# Altium PCB diban1.PcbDoc (part 1 of 2)
Units mil, origin at the board's own origin, x right, y up, seen from the top; angles counter-clockwise.
Board outline 3145.03 x 2732.03 mil, 2 copper layers (Top Layer, Bottom Layer); 163 components, 145 nets, 662 pads, 182 vias.
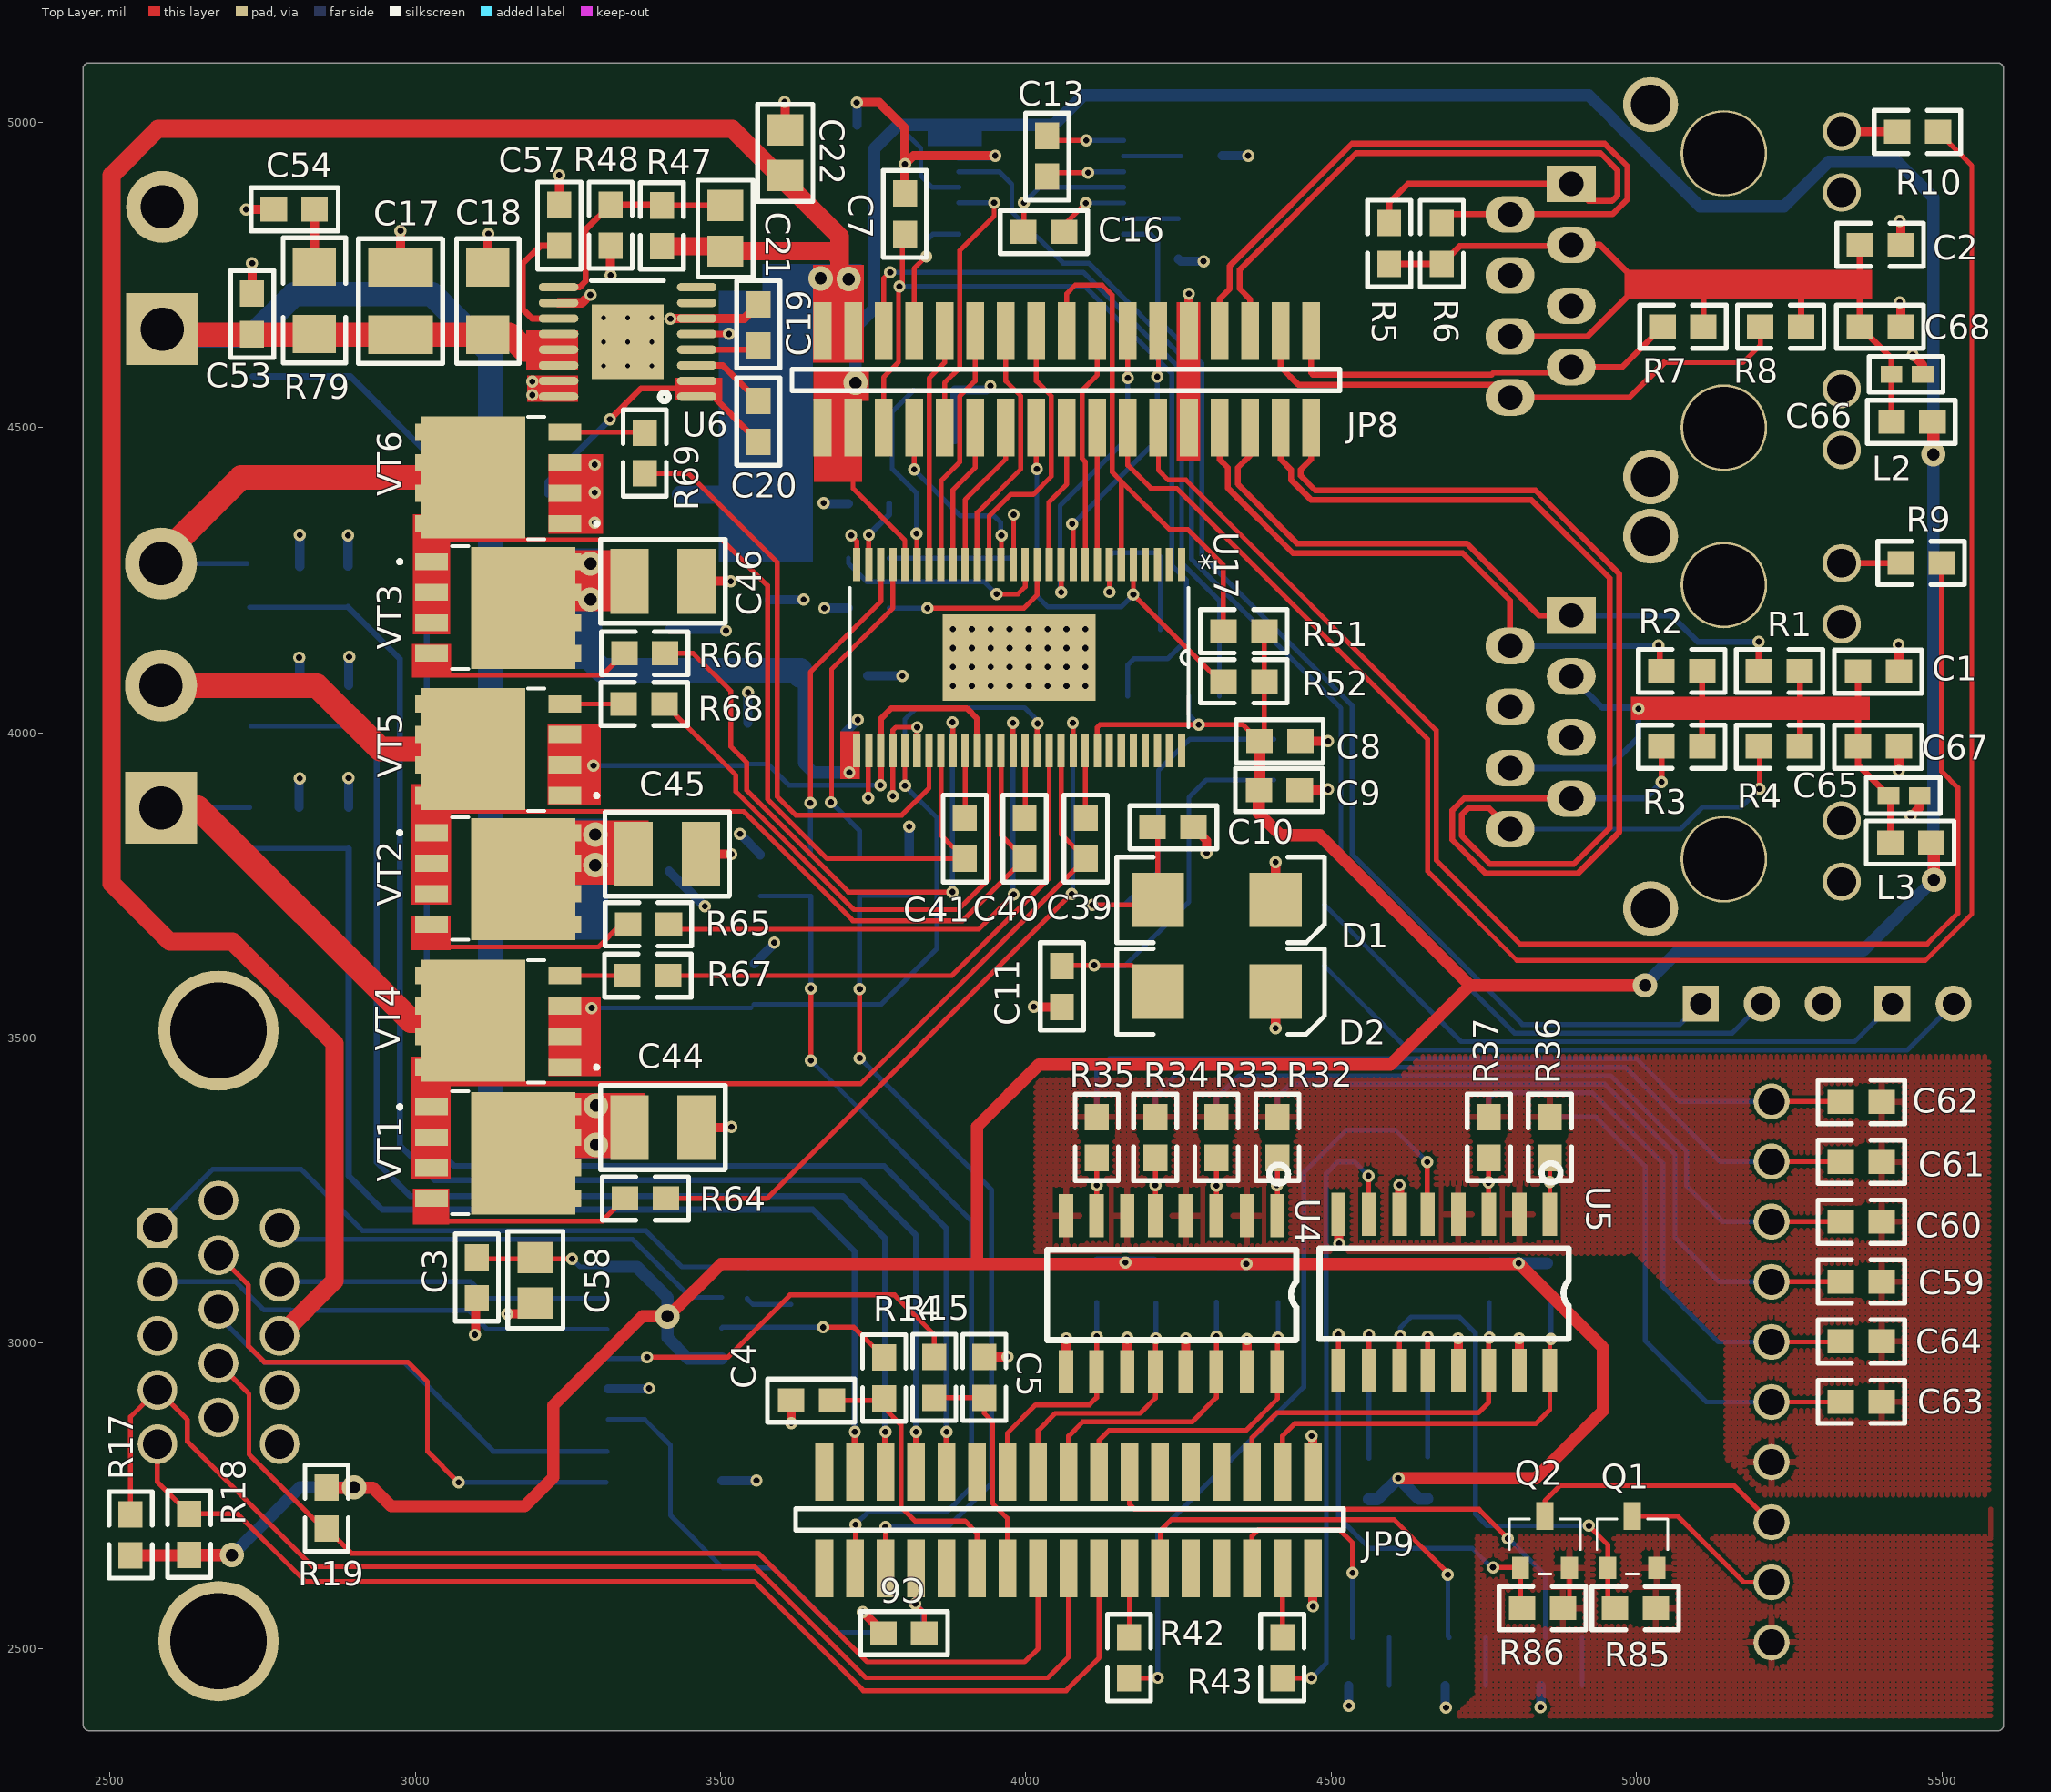
[diagram p0: Top Layer view]
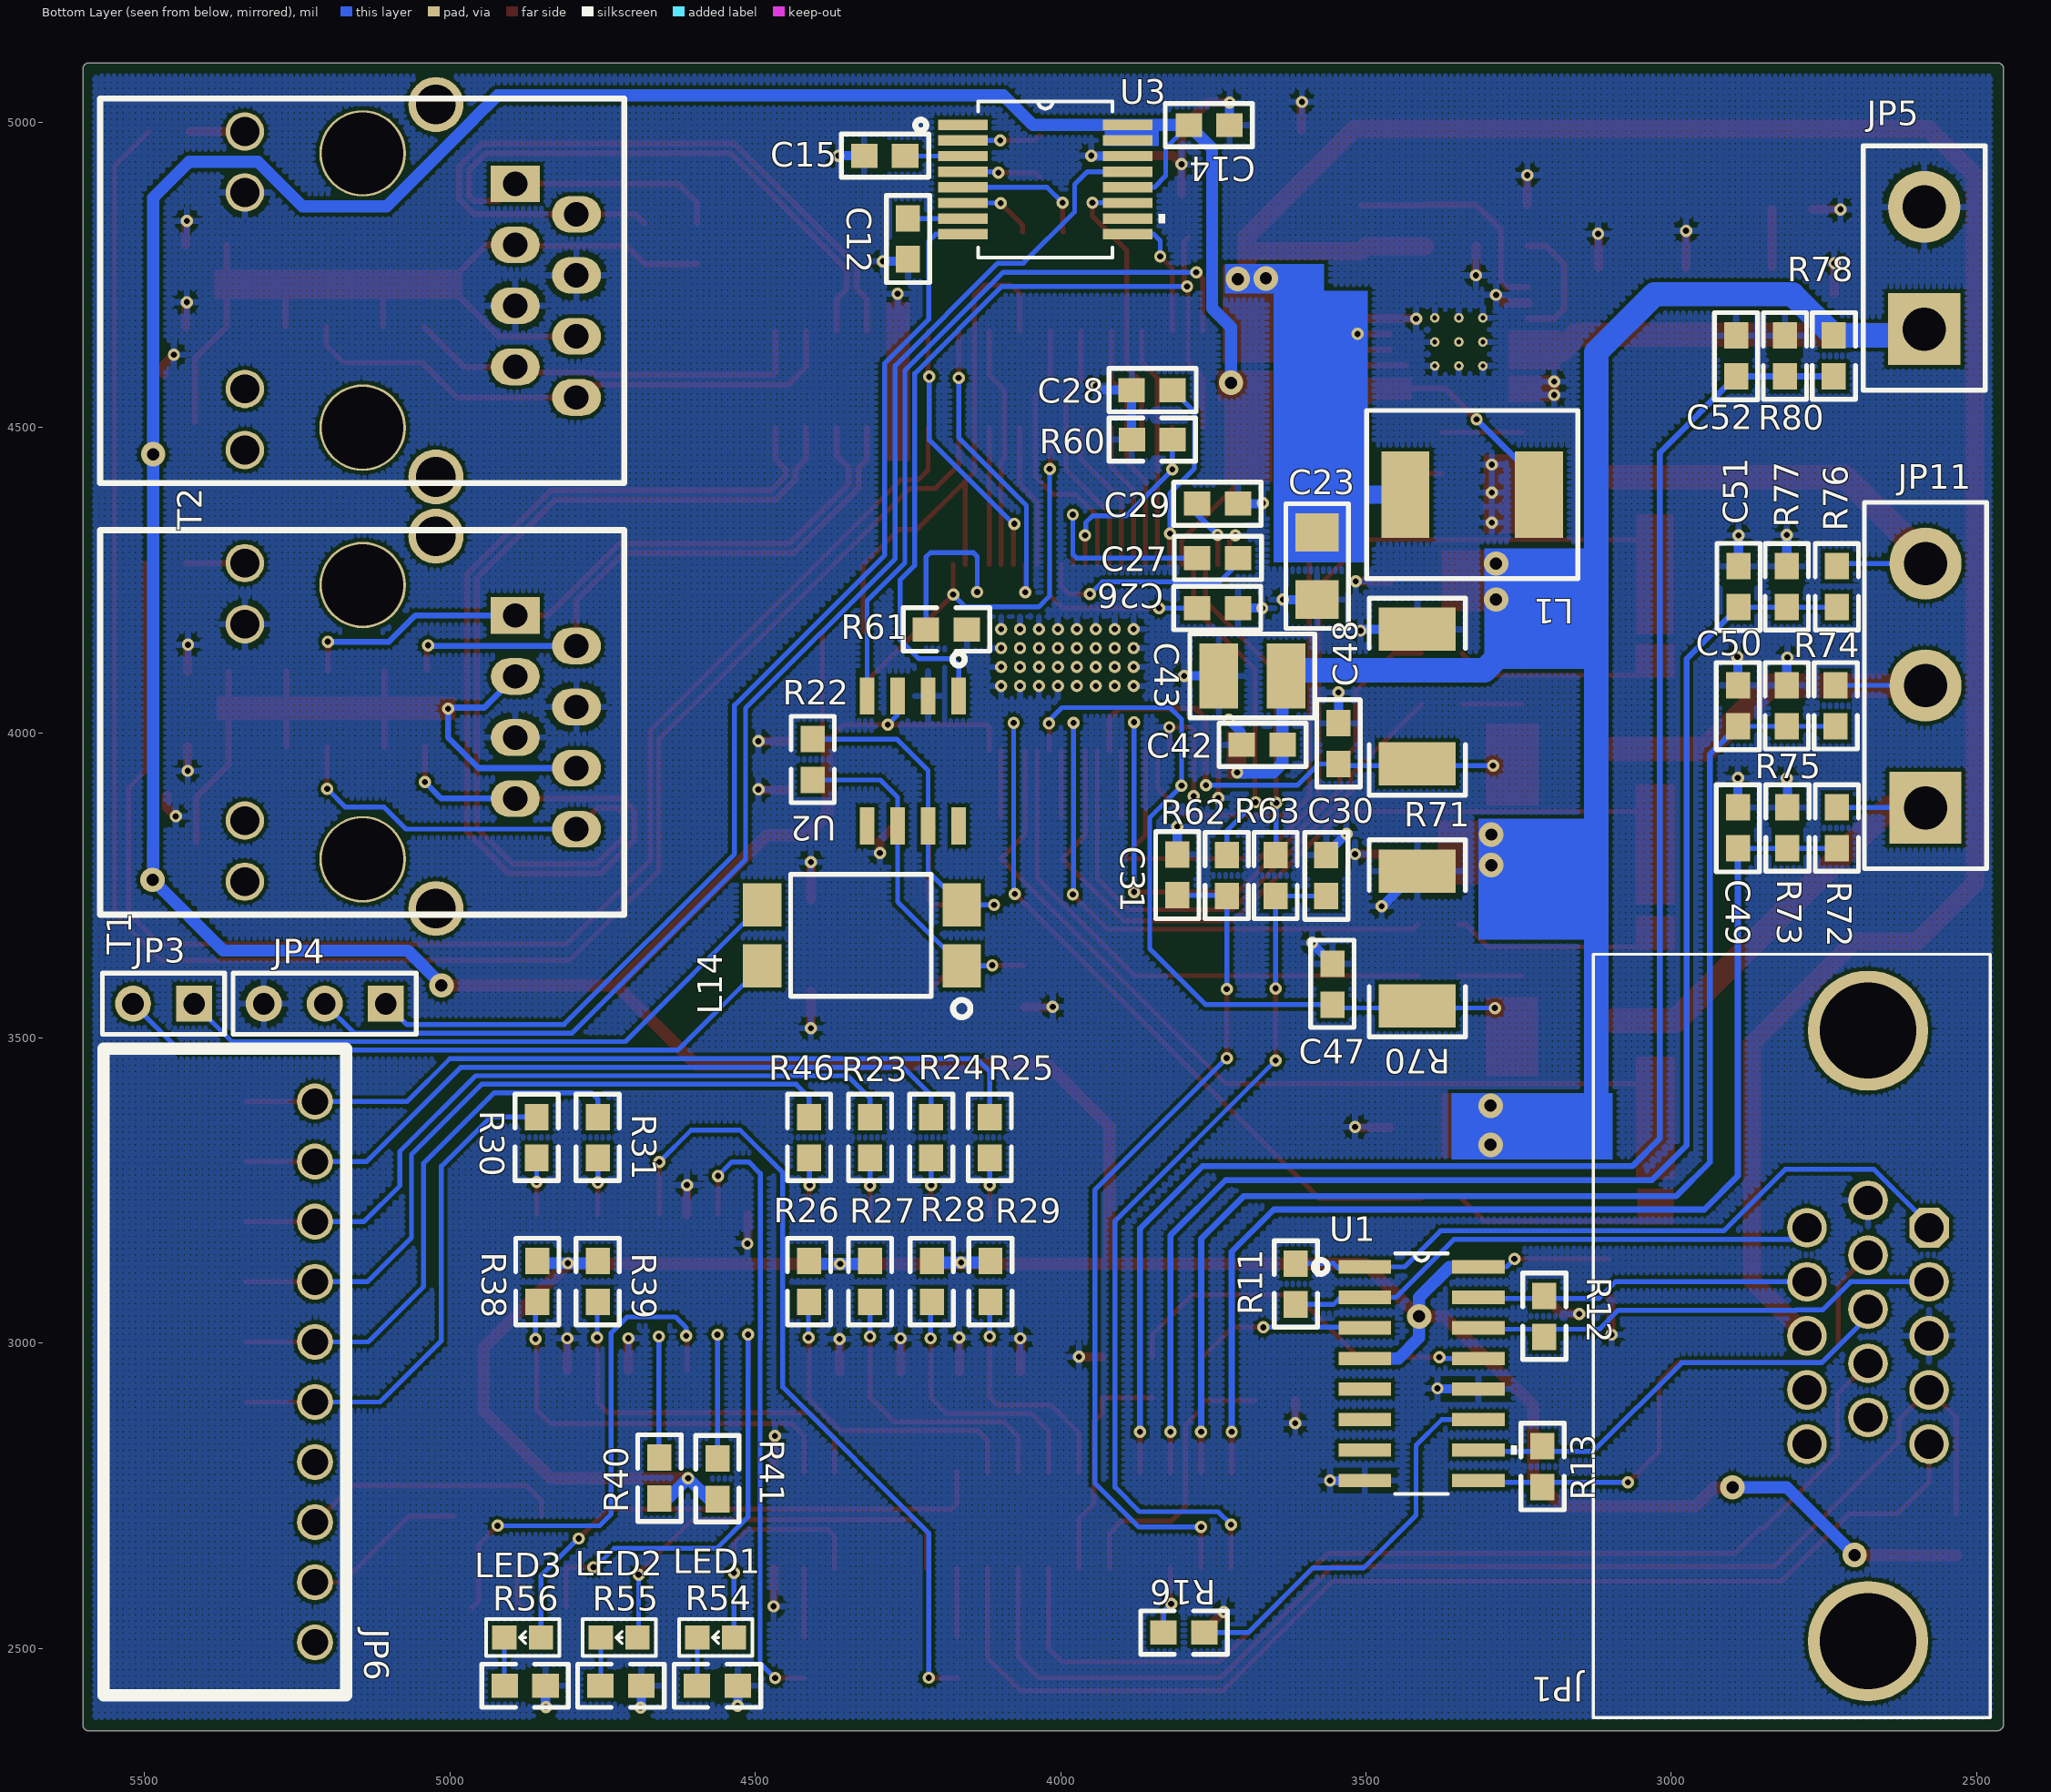
[diagram p1: Bottom Layer view, seen from below]

## Layer stack, top to bottom
Top Solder: solder mask 0.4, Solder Resist, Dk 3.5
Top Layer: signal copper 1.4
Dielectric 1: dielectric 12.6, FR-4, Dk 4.8
Bottom Layer: signal copper 1.4
Bottom Solder: solder mask 0.4, Solder Resist, Dk 3.5

## Board outline
2459.44,2368.44 cw(c2466,2376) 2455.99,2376 2455.99,5087 cw(c2466,5087) 2466,5097.02 5591,5097.02 cw(c5591,5087) 5601.02,5087 5601.02,2375 cw(c5591,2375) 5591,2364.99 2467,2364.99 cw(c2467,2375)

## Design rules (kind name [scope] priority, off if disabled: settings)
Clearance [All] p1: gap=6
ComponentClearance [All] p1: gap=0 collisioncheckmode=3 verticalgap=0 showdistances=FALSE
DiffPairsRouting [All] p1: maxlimit=6.3 minlimit=6.3 mostfreqgap=6.3 toplayer_minwidth=9.7 toplayer_maxwidth=9.7 toplayer_prefwidth=9.7 bottomlayer_minwidth=9.7 bottomlayer_maxwidth=9.7 bottomlayer_prefwidth=9.7 maxuncoupledlength=500
HoleSize [All] p1: absolutevalues=TRUE maxlimit=200 minlimit=1 maxpercent=80.000 minpercent=20.000
HoleToHoleClearance [All] p1: gap=7 allowstackedmicrovias=TRUE
MinimumSolderMaskSliver [All] p1: minsoldermaskwidth=0
PolygonConnect [All] p1: connectstyle=Relief reliefconductorwidth=10 reliefentries=4 polygonreliefangle="90 Angle" airgapwidth=10
RoutingVias [All] p1: holewidth=10 width=20 viastyle="Through Hole" minholewidth=10 minwidth=20 maxholewidth=28 maxwidth=50
SilkToSilkClearance [All] p1: silktosilkclearance=0
SilkToSolderMaskClearance [IsPad] p1: minsilkscreentomaskgap=0 clearancetoexposedcopper=TRUE
SolderMaskExpansion [All] p1: expansion=4
Width [All] p1: maxlimit=40 minlimit=8 preferedwidth=8
23 further rules are at their usual default settings.

## Classes and differential pairs
differential pair TXB: +TXB_P -TXB_N
differential pair TXA: +TXA_P -TXA_N
differential pair RXB: +RXB_P -RXB_N
differential pair RXA: +RXA_P -RXA_N

## Components (designator, comment, footprint, x,y, rotation, side; value= is the part's Value field where it differs from the comment)
C1 "0603B223J6R3NT" CC1608-0603 5396,4100 r180 top
C2 "0603B223J6R3NT" CR1608-0603 5399,4799 r180 top
C3 "0603B103J6R3NT" CC1608-0603 3101,3107 r90 top
C4 "0603B150J6R3NT" CC1608-0603 3649,2906 r180 top
C5 "0603B150J6R3NT" CR1608-0603 3932,2944 r270 top
C6 "0603B150J6R3NT" CC1608-0603 3800.13,2525 r0 top
C7 "0603B104J6R3NT" CC1608-0603 3802,4850 r270 top
C8 "0603B104J6R3NT" CC1608-0603 4416,3986 r180 top
C9 "0603B104J6R3NT" CC1608-0603 4415,3906 r180 top
C10 "0603B104J6R3NT" CC1608-0603 4241,3845 r0 top
C11 "0603B104J6R3NT" CC1608-0603 4059,3584 r90 top
C12 "0603B104J6R3NT" CC1608-0603 4250,4809 r270 bottom
C13 "0603B104J6R3NT" CC1608-0603 4035,4944 r270 top
C14 "0603B104J6R3NT" CC1608-0603 3756.87,4995 r0 bottom
C15 "0603B104J6R3NT" CC1608-0603 4288.13,4945 r180 bottom
C16 "0603B104J6R3NT" CC1608-0603 4029,4820 r0 top
C17 "C3225X7S2A475M200AB" CC3225-1210 2976,4707 r90 top
C18 "C3216X5R2A105K" CC3216-1206 3119,4707 r90 top
C19 "0603B225J6R3NT" CC1608-0603 3562,4668 r90 top
C20 "0603B474J6R3NT" CC1608-0603 3562,4510 r270 top
C21 "CL21C360JBANNNC" CC2012-0805 3508,4826 r270 top
C22 "GRM21BR61E475KA12L" CC2012-0805 3606,4950 r270 top
C23 "GRM31CR61A476KE15L" CC3216-1206 3580,4273 r90 bottom
C26 "0603B225J6R3NT" CC1608-0603 3743,4204 r0 bottom
C27 "0603B223J500NT" CC1608-0603 3743,4286 r180 bottom
C28 "0603B105J250NT" CC1608-0603 3850.13,4561 r180 bottom
C29 "0603B105J250NT" CC1608-0603 3742.87,4375 r0 bottom
C30 "0603B222J6R3NT" CC1608-0603 3565,3766 r270 bottom
C31 "0603B222J6R3NT" CC1608-0603 3809,3767.13 r270 bottom
C39 "0603B104J500NT" CC1608-0603 4098,3827 r270 top
C40 "0603B104J500NT" CC1608-0603 3998,3827 r270 top
C41 "0603B104J500NT" CC1608-0603 3900,3827 r270 top
C42 "0603B104J101NT" CC1608-0603 3670,3980 r180 bottom
C43 "GRM32ER72A225KA35L" CC3225-1210 3686,4093 r180 bottom
C44 "GRM32ER72A225KA35L" CC3225-1210 3406,3353 r0 top
C45 "GRM32ER72A225KA35L" CC3225-1210 3413,3801 r0 top
C46 "GRM32ER72A225KA35L" CC3225-1210 3406,4248 r0 top
C47 "0603B102J500NT" CC1608-0603 3555,3588 r90 bottom
C48 "0603B102J500NT" CC1608-0603 3545,3982 r90 bottom
C49 "0603B104J160NT" CC1608-0603 2891,3844 r270 bottom
C50 "0603B104J160NT" CC1608-0603 2891,4044 r270 bottom
C51 "0603B104J160NT" CC1608-0603 2890,4239.13 r270 bottom
C52 "0603B104J160NT" CC1608-0603 2894,4617 r270 bottom
C53 "0603B104J101NT" CC1608-0603 2733,4686 r270 top
C54 "0603B103J101NT" CC1608-0603 2802,4857 r0 top
C57 "0603B474J6R3NT" CC1608-0603 3236,4831 r270 top
C58 "0805B106J100NT" CC2012-0805 3197,3103 r90 top
C59 "0603B104J6R3NT" CR1608-0603 5368,3101 r180 top
C60 "0603B104J6R3NT" CR1608-0603 5368,3199 r180 top
C61 "0603B104J6R3NT" CR1608-0603 5368,3297 r180 top
C62 "0603B104J6R3NT" CR1608-0603 5368,3395 r180 top
C63 "0603B104J6R3NT" CR1608-0603 5368,2904 r0 top
C64 "0603B104J6R3NT" CR1608-0603 5368,3003 r0 top
C65 "0402B104J6R3NT" CC1005-0402 5438,3897 r180 top
C66 "0402B104J6R3NT" CC1005-0402 5443,4587 r180 top
C67 "0603B223J6R3NT" CC1608-0603 5396,3977 r180 top
C68 "0603B223J6R3NT" CC1608-0603 5399,4665 r180 top
D1 "Diode Schottky" TVS 4409,3726 r180 top
D2 "Diode Schottky" TVS 4409,3576 r180 top
JP1 "DB15" DB15 2778,3012 r0 bottom
JP3 "CAN" HDR1X2 5419,3556 r0 bottom
JP4 "RS232" HDR1X3 5105,3556 r0 bottom
JP5 "Header 2" "5.08MM 2PIN" 2586,4661 r90 bottom
JP6 "PIN10" 2.5mm 5221,2510 r90 bottom
JP8 "Header 17X2" DC_1.27_32 3667,4500 r180 top locked
JP9 "Header 17X2" DC_1.27_32 4470,2789 r0 top locked
JP11 "Header 3" "5.08MM 3PIN" 2584,3877 r90 bottom
L1 "SPR6540-150M" SPR6540 3217,4390 r0 bottom
L2 "BLM18EG221SN1D" BLM0603 5451,4509 r180 top
L3 "BLM18EG221SN1D" BLM0603 5449,3820 r180 top
L14 "ZJYS81R5" ZJYS81R5 4162,3618 r0 bottom
LED1 "LED Chip" 0603D 4535,2518 r0 bottom
LED2 "LED Chip" 0603D 4693,2518 r0 bottom
LED3 "LED Chip" 0603D 4851,2518 r0 bottom
Q1 "NPN" SOT-23 4953,2632 r0 top
Q2 "NPN" SOT-23 4810,2632 r0 top
R1 "RC03K49R9JT" CR1608-0603 5234,4101 r0 top
R2 "RC03K49R9JT" CR1608-0603 5074,4101 r0 top
R3 "RC03K49R9JT" CR1608-0603 5074,3977 r0 top
R4 "RC03K49R9JT" CR1608-0603 5234,3977 r0 top
R5 "RC03K49R9JT" CR1608-0603 4595,4801 r270 top
R6 "RC03K49R9JT" CR1608-0603 4681,4801 r270 top
R7 "RC03K49R9JT" CR1608-0603 5076,4665 r0 top
R8 "RC03K49R9JT" CR1608-0603 5236,4665 r0 top
R9 "RC03K331JT" CR1608-0603 5466,4278 r180 top
R10 "RC03K331JT" CR1608-0603 5460,4984 r180 top
R11 "RC03K101JT" CR1608-0603 3615,3097 r90 bottom
R12 "RC03K101JT" CR1608-0603 3208,3044 r270 bottom
R13 "RC03K101JT" CR1608-0603 3211,2798 r270 bottom
R14 "RC03K100JT" CR1608-0603 3768,2943 r90 top
R15 "RC03K100JT" CR1608-0603 3850,2944 r90 top
R16 "RC03K100JT" CR1608-0603 3798,2526 r180 bottom
R17 "RC03K492JT" CR1608-0603 2534,2686 r90 top
R18 "RC03K492JT" CR1608-0603 2630,2687 r90 top
R19 "RC03K492JT" CR1608-0603 2855,2730 r270 top
R22 "RC03K121JT" CR1608-0603 4406,3956 r90 bottom
R23 "RC03K492JT" CR1608-0603 4312,3337 r90 bottom
R24 "RC03K492JT" CR1608-0603 4212,3337 r90 bottom
R25 "RC03K492JT" CR1608-0603 4116,3337 r90 bottom
R26 "RC03K492JT" CR1608-0603 4412,3101 r90 bottom
R27 "RC03K492JT" CR1608-0603 4312,3101 r90 bottom
R28 "RC03K492JT" CR1608-0603 4211,3101 r90 bottom
R29 "RC03K492JT" CR1608-0603 4115,3101 r90 bottom
R30 "RC03K492JT" CR1608-0603 4858,3337 r90 bottom
R31 "RC03K492JT" CR1608-0603 4758,3337 r90 bottom
R32 "RC03K501JT" CR1608-0603 4412,3337 r90 top
R33 "RC03K501JT" CR1608-0603 4312,3337 r90 top
R34 "RC03K501JT" CR1608-0603 4212,3337 r90 top
R35 "RC03K501JT" CR1608-0603 4116,3337 r90 top
R36 "RC03K501JT" CR1608-0603 4858,3337 r270 top
R37 "RC03K501JT" CR1608-0603 4758,3337 r270 top
R38 "RC03K492JT" CR1608-0603 4857,3101 r90 bottom
R39 "RC03K492JT" CR1608-0603 4758,3101 r90 bottom
R40 "RC03K492JT" CR1608-0603 4657,2779 r270 bottom
R41 "RC03K492JT" CR1608-0603 4562,2778 r270 bottom
R42 "RC03K492JT" CR1608-0603 4169,2485 r90 top
R43 "RC03K492JT" CR1608-0603 4420,2485 r90 top
R46 "RC03K492JT" CR1608-0603 4412,3337 r90 bottom
R47 "RC03K105JT" CR1608-0603 3404,4830 r90 top
R48 "RC03K2553JT" CR1608-0603 3320,4831 r270 top
R51 "RC03K103JT" CR1608-0603 4357,4166 r0 top
R52 "RC03K103JT" CR1608-0603 4357,4084 r0 top
R54 "RC03K331JT" CR1608-0603 4562,2439 r0 bottom
R55 "RC03K331JT" CR1608-0603 4720,2439 r0 bottom
R56 "RC03K331JT" CR1608-0603 4877,2439 r0 bottom
R60 "RC03K102JT" CR1608-0603 3850,4480 r180 bottom
R61 "RC03K101JT" CR1608-0603 4187,4169 r0 bottom
R62 "RC03K560JT" CR1608-0603 3728,3766 r90 bottom
R63 "RC03K560JT" CR1608-0603 3648,3766 r90 bottom
R64 "RC03K100JT" CR1608-0603 3377,3237 r0 top
R65 "RC03K100JT" CR1608-0603 3382,3686 r0 top
R66 "RC03K100JT" CR1608-0603 3376,4130 r0 top
R67 "RC03K100JT" CR1608-0603 3381,3602 r0 top
R68 "RC03K100JT" CR1608-0603 3375,4047 r0 top
R69 "RC03K100JT" CR1608-0603 3376,4458 r270 top
R70 "CRA2512-FZ-R010ELF" CR6332-2512 3416,3663 r270 bottom
R71 "CRA2512-FZ-R010ELF" CR6332-2512 3416,4059 r270 bottom
R72 "RC03K154JT" CR1608-0603 2729,3844 r270 bottom
R73 "RC03K103JT" CR1608-0603 2810,3844 r270 bottom
R74 "RC03K154JT" CR1608-0603 2731,4044 r270 bottom
R75 "RC03K103JT" CR1608-0603 2811,4044 r270 bottom
R76 "RC03K154JT" CR1608-0603 2729,4239 r270 bottom
R77 "RC03K103JT" CR1608-0603 2811,4239 r270 bottom
R78 "RC03K154JT" CR1608-0603 2734,4617 r90 bottom
R79 "CRCW12063R30JNEA" CR3216-1206 2835,4708 r270 top
R80 "RC03K103JT" CR1608-0603 2814,4617 r270 bottom
R85 "RC03K501JT" CR1608-0603 4998,2566 r0 top
R86 "RC03K501JT" CR1608-0603 4846,2566 r0 top
T1 "HR911102_RJ45" RJ45 4793,4042 r90 bottom locked
T2 "HR911102_RJ45" RJ45 4793,4749 r90 bottom locked
U1 "ADN4666ARZ" ADN4666 3409,2950 r180 bottom
U2 "TCAN322" TCAN332 4167,4060 r270 bottom
U3 "MAX3227E_DB_16" MAX3227E 4025,4906 r180 bottom
U4 "PS2805C-4" PS2805C_4 4412,3209 r270 top
U5 "PS2805C-4" PS2805C_4 4858,3211 r270 top
U6 "LM46002PWPR" IM46002 3348,4640 r180 top
U17 "DRV8301" DRV8301 3989,4123 r270 top
VT1 "CSD18540" "CSD18540 - duplicate" 3136,3312 r0 top
VT2 "CSD18540" "CSD18540 - duplicate" 3136,3761 r0 top
VT3 "CSD18540" "CSD18540 - duplicate" 3136,4205 r0 top
VT4 "CSD18540" "CSD18540 - duplicate" 3136,3527 r180 top
VT5 "CSD18540" "CSD18540 - duplicate" 3136,3972 r180 top
VT6 "CSD18540" "CSD18540 - duplicate" 3136,4417 r180 top

## Footprints (in the part's own frame and the unit in brackets; to place one, negate y for a bottom-side part, rotate by r counter-clockwise, add the part's x,y. Pads: shape width x height; smd on the part's side, far side on the other; paste and mask are expansions set on the pad)
2.5mm [mm]
  round 1.5 hole 1.1: 1(0,0) 2(2.5,0) 3(5,0) 4(7.5,0) 5(10,0) 6(12.5,0) 7(15,0) 8(17.5,0) 9(20,0) 10(22.5,0)
  silkscreen extent -2.2,-1.3 24.7,8.8
"5.08MM 2PIN" [mm]
  rect 3x3 hole 1.8: 1(0,0)
  round 3 hole 1.8: 2(5.08,0)
  silkscreen extent -2.54,-2.54 7.62,2.54
"5.08MM 3PIN" [mm]
  rect 3x3 hole 1.8: 1(0,0)
  round 3 hole 1.8: 2(5.08,0) 3(10.16,0)
  silkscreen extent -2.54,-2.54 12.7,2.54
0603D [mil]
  rect 40x40 smd: 1(0,0) 2(60,0)
  silkscreen extent -30,-30 90,30
ADN4666 [mil]
  rect 86x22 smd: 1(-93,175) 2(-93,125) 3(-93,75) 4(-93,25) 5(-93,-25) 6(-93,-75) 7(-93,-125) 8(-93,-175) 9(93,-175) 10(93,-125) 11(93,-75) 12(93,-25) 13(93,25) 14(93,75) 15(93,125) 16(93,175)
  silkscreen extent -176,-197 156,197
BLM0603 [mm]
  rect 1.1x1 smd: 1(-0.85,0) 2(0.85,0)
  silkscreen extent -1.8,-0.9 1.86,0.9
CC1005-0402 [mm]
  rect 0.9x0.7 smd: 1(-0.65,0) 2(0.65,0)
  silkscreen extent -1.5,-0.75 1.57,0.75
CC1608-0603 [mm]
  rect 1.1x1 smd: 1(-0.85,0) 2(0.85,0)
  silkscreen extent -1.8,-0.9 1.83,0.9
CC2012-0805 [mm]
  rect 1.3x1.5 smd: 1(-0.95,0) 2(0.95,0)
  silkscreen extent -2,-1.15 2.03,1.15
CC3216-1206 [mm]
  rect 1.6x1.8 smd: 1(-1.4,0) 2(1.4,0)
  silkscreen extent -2.6,-1.3 2.59,1.3
CC3225-1210 [mm]
  rect 1.6x2.7 smd: 1(-1.4,0) 2(1.4,0)
  silkscreen extent -2.6,-1.75 2.59,1.75
CR1608-0603 [mm]
  rect 1.1x1 smd: 1(-0.85,0) 2(0.85,0)
  silkscreen extent -1.8,-0.9 1.8,0.9
CR3216-1206 [mm]
  rect 1.6x1.8 smd: 1(-1.4,0) 2(1.4,0)
  silkscreen extent -2.6,-1.3 2.6,1.3
CR6332-2512 [mm]
  rect 1.8x3.2 smd: 1(-2.8,0) 2(2.8,0)
  silkscreen extent -4.1,-2 4.1,2
"CSD18540 - duplicate" [mm]
  rect 1.372x0.71 smd paste-0.673: 1(-2.77,-0.635) 1(-2.77,0.635) 1(-2.77,1.905) 4(-2.77,-1.905) 5(2.77,-1.905) 5(2.77,-0.635) 5(2.77,0.635) 5(2.77,1.905)
  rect 4.343x5.08 smd: 5(1.041,-0.025)
  silkscreen extent -4.17,-2.55 -1.25,2.55
DB15 [mil]
  oct 65x65 hole 48: 1(-200,-177.16)
  round 65 hole 48: 2(-200,-88.58) 3(-200,0) 4(-200,88.58) 5(-200,177.16) 6(-100,-222) 7(-100,-132.16) 8(-100,-43.58) 9(-100,45) 10(-100,133.58) 11(0,-177.16) 12(0,-88.58) 13(0,0) 14(0,88.58) 15(0,177.16)
  round 196.85 hole 157.48: 16(-100,-500) 17(-100,500)
  silkscreen extent -300,-625 350,625
DC_1.27_32 [mm]
  rect 0.74x2.4 smd: 1(0,0) 2(0,-4.013) 3(-1.27,0) 4(-1.27,-4.013) 5(-2.54,0) 6(-2.54,-4.013) 7(-3.81,0) 8(-3.81,-4.013) 9(-5.08,0) 10(-5.08,-4.013) 11(-6.35,0) 12(-6.35,-4.013) 13(-7.62,0) 14(-7.62,-4.013) 15(-8.89,0) 16(-8.89,-4.013) 17(-10.16,0) 18(-10.16,-4.013) 19(-11.43,0) 20(-11.43,-4.013) 21(-12.7,0) 22(-12.7,-4.013) 23(-13.97,0) 24(-13.97,-4.013) 25(-15.24,0) 26(-15.24,-4.013) 27(-16.51,0) 28(-16.51,-4.013) 29(-17.78,0) 30(-17.78,-4.013) 31(-19.05,0) 32(-19.05,-4.013) 33(-20.32,0) 34(-20.32,-4.013)
  silkscreen extent -21.51,-2.41 1.27,-1.52
DRV8301 [mil]
  rect 54x12 smd: 1(-152.5,265.75) 2(-152.5,246.06) 3(-152.5,226.38) 4(-152.5,206.69) 5(-152.5,187.01) 6(-152.5,167.32) 7(-152.5,147.64) 8(-152.5,127.95) 9(-152.5,108.27) 10(-152.5,88.58) 11(-152.5,68.9) 12(-152.5,49.21) 13(-152.5,29.53) 14(-152.5,9.84) 15(-152.5,-9.84) 16(-152.5,-29.53) 17(-152.5,-49.21) 18(-152.5,-68.9) 19(-152.5,-88.58) 20(-152.5,-108.27) 21(-152.5,-127.95) 22(-152.5,-147.64) 23(-152.5,-167.32) 24(-152.5,-187.01) 25(-152.5,-206.69) 26(-152.5,-226.38) 27(-152.5,-246.06) 28(-152.5,-265.75) 29(152.5,-265.75) 30(152.5,-246.06) 31(152.5,-226.38) 32(152.5,-206.69) 33(152.5,-187.01) 34(152.5,-167.32) 35(152.5,-147.64) 36(152.5,-127.95) 37(152.5,-108.27) 38(152.5,-88.58) 39(152.5,-68.9) 40(152.5,-49.21) 41(152.5,-29.53) 42(152.5,-9.84) 43(152.5,9.84) 44(152.5,29.53) 45(152.5,49.21) 46(152.5,68.9) 47(152.5,88.58) 48(152.5,108.27) 49(152.5,127.95) 50(152.5,147.64) 51(152.5,167.32) 52(152.5,187.01) 53(152.5,206.69) 54(152.5,226.38) 55(152.5,246.06) 56(152.5,265.75)
  round 20 / inner round 60 / far side round 20 hole 10: 57(-46.5,108.5) 57(-46.5,77.5) 57(-46.5,46.5) 57(-46.5,-15.5) 57(-46.5,15.5) 57(-46.5,-46.5) 57(-46.5,-77.5) 57(-46.5,-108.5) 57(-15.5,108.5) 57(-15.5,77.5) 57(-15.5,46.5) 57(-15.5,15.5) 57(-15.5,-15.5) 57(-15.5,-46.5) 57(-15.5,-77.5) 57(-15.5,-108.5) 57(15.5,108.5) 57(15.5,77.5) 57(15.5,46.5) 57(15.5,15.5) 57(15.5,-15.5) 57(15.5,-46.5) 57(15.5,-77.5) 57(15.5,-108.5) 57(46.5,108.5) 57(46.5,77.5) 57(46.5,46.5) 57(46.5,-15.5) 57(46.5,15.5) 57(46.5,-46.5) 57(46.5,-77.5) 57(46.5,-108.5)
  rect 142.13x250 smd mask-124.5: 57(0,0)
  silkscreen extent -114,-278 114,278
HDR1X2 [mm] "Connector; Header; 2 Position"
  rect 1.5x1.5 hole 0.9: 1(0,0)
  round 1.5 hole 0.9: 2(2.54,0)
  silkscreen extent -1.27,-1.27 3.81,1.27
HDR1X3 [mm] "Connector; Header; 3 Position"
  rect 1.5x1.5 hole 0.9: 1(0,0)
  round 1.5 hole 0.9: 2(2.54,0) 3(5.08,0)
  silkscreen extent -1.27,-1.27 6.35,1.27
IM46002 [mm]
  oval 1.65x0.35 smd paste-0.102 mask+0.051: 1(-2.875,2.275) 2(-2.875,1.625) 3(-2.875,0.975) 4(-2.875,0.325) 5(-2.875,-0.325) 6(-2.875,-0.975) 7(-2.875,-1.625) 8(-2.875,-2.275) 9(2.875,-2.275) 10(2.875,-1.625) 11(2.875,-0.975) 12(2.875,-0.325) 13(2.875,0.325) 14(2.875,0.975) 15(2.875,1.625) 16(2.875,2.275)
  round 0.4 / inner round 1.524 / far side round 0.4 hole 0.2 mask+0.051: 17(-1,1) 17(-1,0) 17(-1,-1) 17(0,1) 17(0,0) 17(0,-1) 17(1,1) 17(1,0) 17(1,-1)
  rect 3x3.1 smd paste-0.102 mask+0.051: 17(0,0)
  silkscreen extent -1.7,-2.55 1.5,2.47
MAX3227E [mil]
  rect 81x17 smd: 1(-135,89.57) 2(-135,63.98) 3(-135,38.39) 4(-135,12.8) 5(-135,-12.8) 6(-135,-38.39) 7(-135,-63.98) 8(-135,-89.57) 9(135,-89.57) 10(135,-63.98) 11(135,-38.39) 12(135,-12.8) 13(135,12.8) 14(135,38.39) 15(135,63.98) 16(135,89.57)
  silkscreen extent -213,-128 196,128
PS2805C_4 [mm]
  rect 1.8x0.6 smd: 1(0,0) 2(0,-1.27) 3(0,-2.54) 4(0,-3.81) 5(0,-5.08) 6(0,-6.25) 7(0,-7.52) 8(0,-8.79) 9(6.5,-8.79) 10(6.5,-7.52) 11(6.5,-6.25) 12(6.5,-5.08) 13(6.5,-3.81) 14(6.5,-2.54) 15(6.5,-1.27) 16(6.5,0)
  silkscreen extent -2.12,-9.58 5.18,0.79
RJ45 [mm]
  round 3.6 hole 3.4: 0(-6.335,8.89) 0(5.075,8.89)
  rect 1.524x2.032 hole 1.016: 1(3.81,2.54)
  oval 1.524x2.032 hole 1.016: 2(2.54,0) 3(1.27,2.54) 4(0,0) 5(-1.27,2.54) 6(-2.54,0) 7(-3.81,2.54) 8(-5.08,0)
  round 1.6 hole 1.2: 9(5.985,13.79) 10(3.445,13.79) 11(-4.725,13.79) 12(-7.265,13.79)
  round 2.286 hole 1.651: 13(-8.385,5.84) 14(7.105,5.84)
  silkscreen extent -8.64,-2 7.36,19.81
SOT-23 [mil]
  rect 28x36 smd: 1(0,0) 2(80,0)
  rect 28x45 smd: 3(40,85)
  silkscreen extent -18,-10 98,80
SPR6540 [mm]
  rect 2x3.6 smd: 1(0,0) 2(5.55,0)
  silkscreen extent -1.63,-3.5 7.16,3.5
TCAN332 [mm]
  rect 1.55x0.6 smd: 1(0,0) 2(0,-1.27) 3(0,-2.54) 4(0,-3.81) 5(5.4,-3.81) 6(5.4,-2.54) 7(5.4,-1.27) 8(5.4,0)
  silkscreen extent -1.78,-0.25 -1.27,0.25
TVS [mm]
  rect 2.16x2.26 smd: 1(0,0) 2(4.9,0)
  silkscreen extent -2.03,-1.78 6.6,1.78
ZJYS81R5 [mm]
  rect 1.6x1.8 smd: 1(0,0) 2(0,-2.54) 3(8.3,-2.54) 4(8.3,0)
  silkscreen extent -0.36,-3.81 7.11,2.14

## Part data
C1 C2 C3 C4 C5 C6 C7 C8 C9 C10 C11 C12 C13 C14 C15 C16 C17 C18 C19 C20 C21 C22 C23 C26 C27 C28 C29 C30 C31 C39 C40 C41 C42 C43 C44 C45 C46 C47 C48 C49 C50 C51 C52 C53 C54 C57 C58 C59 C60 C61 C62 C63 C64 C65 C66 C67 C68: library part CAP
D1 D2: "Schottky Diode"
JP3: library part "Header 2", "Header, 2-Pin"
JP4: library part "Header 3_1", "Header, 3-Pin"
JP5: "Header, 2-Pin"
JP8 JP9: "Header, 16-Pin, Dual row"
JP11: "Header, 3-Pin"
L1: library part "Inductor Chip", "Inductor"
L2 L3: library part "Inductor Iron", "Magnetic-Core Inductor"
LED1 LED2 LED3: "Typical Chip LED"
Q1 Q2: "NPN Bipolar Transistor"
R1 R2 R3 R4 R5 R6 R7 R8 R9 R10 R11 R12 R13 R14 R15 R16 R17 R18 R19 R22 R23 R24 R25 R26 R27 R28 R29 R30 R31 R32 R33 R34 R35 R36 R37 R38 R39 R40 R41 R42 R43 R46 R47 R48 R51 R52 R54 R55 R56 R60 R61 R62 R63 R64 R65 R66 R67 R68 R69 R70 R71 R72 R73 R74 R75 R76 R77 R78 R79 R80 R85 R86: library part Resistor
U1 U3 U6: "Imported"
U4 U5: "Optoisolator"

## Via types
v1: diameter 20, hole 10, Top Layer to Bottom Layer, 167 vias
v2: diameter 40, hole 20, Top Layer to Bottom Layer, 15 vias

## Nets (pads, with @x,y where several pads share a name; then routed paths per layer and width w, separated by ;. In a path a pad name is that pad's centre, name@x,y a point inside that pad or via, vN(x,y) a via of type N, cw(c..) or ccw(c..) an arc to the next point about the centre after c; other vN are vias at no path point)
3V3: C3.2 C8.2 C9.2 C14.2 C58.2 JP8.1 JP8.3 L2.1 L3.1 R17.1 R18.1 R19.1 R26.2 R27.2 R28.2 R29.2 R38.2 R39.2 R40.2 R41.2 R51.2 R52.2 U1.4 U1.16 U2.3 U3.12 U3.15 U3.16 U17.24 U17.49 | length 11245.9
  Top Layer w8: C3.2@3103.46,3138 v1(3257,3138) ; JP8.3@3717,4500 3717,4400 3801.99,4315.01 U17.24@3801.99,4275.5 ; U17.49@4116.95,3970.5 4116.95,4008.95 4121,4013 v1(4283,4013) 4355.54,4013 C8.2@4382.54,3986 4390.46,3993.93 R52.2@4390.46,4084 R51.2@4390.46,4166 ; C9.2@4381.54,3906 C9.2@4382.54,3907
  Top Layer w15: L3.1@5482.46,3820 L3.1@5487,3815.46
  Top Layer w20: R17.1@2534,2652.54 2629,2652.54 2629.46,2653 v2(2700,2653) ; R19.1@2855,2763.46 2930.54,2763.46 2961,2733 3179,2733 3226,2780 3226,2898 3372,3044 v2(3413,3044) 3415,3044 3501,3130 3920,3130 ; C9.2@4381.54,3906 4381.54,3867.46 4417,3832 4481,3832 4727,3586 ; C9.2@4382.54,3907 C8.2@4382.54,3986 ; v1(4610,2779) 4835,2779 4945,2889 4945,2993 v1(4807,3131) ; v1@4807,3130 v1(4361,3130) 3920,3130 ; v2(5014,3586) 4727,3586 ; v2(5486,4456) L2.1@5486,4507.46 ; v2(5487,3759) L3.1@5487,3815.46 ; 3920,3130 3920,3355 4021,3456 4597,3456 4727,3586
  Bottom Layer w8: v1(3257,3138) 3270,3125 U1.16@3316,3125 ; C14.2@3790.9,4995.57 C14.2@3790.33,4995 3828,4957.33 3828,4912 3846.8,4893.2 U3.12@3890,4893.2 ; U2.3@4267,4060 4267,4029 v1(4283,4013)
  Bottom Layer w20: v2(2700,2653) 2811,2764 v2(2900,2764) ; U1.16@3316,3125 3363,3125 3413,3075 v2(3413,3044) 3413,3009 3447,2975 U1.4@3502,2975 ; v2(3721,4573) 3721,4664 3752,4695 3752,4956.67 C14.2@3790.33,4995 ; C14.2@3790.9,4995.57 U3.16@3890,4995.57 4045.57,4995.57 4094,5044 4922,5044 4961.92,5004.08 4961.92,5003.46 5103.44,4861.94 5178.98,4861.94 5179.04,4862 5212.77,4862 5212.83,4861.94 5241.44,4861.94 5314.5,4935 5427,4935 5486,4876 v2(5486,4456) v2@5486,3758 ; R29.2@4117.46,3132 v1(4163,3132) R28.2@4208.54,3132 ; R27.2@4316.46,3130 v1(4361,3130) R26.2@4407.54,3130 ; R41.2@4562,2744.54 4575.54,2744.54 v1(4610,2779) 4643.46,2745.54 R40.2@4657,2745.54 ; R39.2@4761.46,3131 v1(4807,3131) R38.2@4853.54,3131 ; v2(5014,3586) 5013,3587 5069,3643 5371,3643 v2@5486,3758 ; v2(5487,3759) v2@5486,3758
5V0: C21.2 C22.2 C23.2 JP1.13 JP8.2 JP8.4 L1.2 R47.1 U6.5 | length 4077.7
  Top Layer w10: U6.5@3461.19,4652.8 3513.8,4652.8 v1(3514,4653)
  Top Layer w30: JP1.13@2778,3012 2868,3102 2868,3490.89 2700.89,3658 2598,3658 2503,3753 2503,4913.11 2578.89,4989 3519,4989 3695,4813 3695,4777 ; R47.1@3404,4796.54 3500.06,4796.54 C21.2@3508,4788.6 3683.4,4788.6 3695,4777 ; 3695,4661 3695,4777
  Bottom Layer w30: L1.2@3435.5,4390 3563,4390
  other v2: 3710,4743 3664,4744
48V: C17.1 C18.1 C42.2 C43.2 C44.1 C45.1 C46.1 C53.2 JP5.1 R78.2 R79.2 U6.12 U6.13 U6.14 U17.29 VT1.5 VT2.5 VT3.5 | length 3206.6
  Top Layer w40: JP5.1@2579,4661 2588.12,4651.88 C17.1@2976,4651.88 C18.1@3119,4651.88 3154.12,4651.88 3178.8,4627.2 U6.13@3234.81,4627.2
  Bottom Layer w20: C43.2@3630.88,4093 3636.54,4087.35 C42.2@3636.54,3980 3636.54,3950.46 3652,3935 v1(3711,3935)
  Bottom Layer w40: JP5.1@2589.54,4650.46 R78.2@2734,4650.46 2801.54,4718 3028,4718 3123,4623 3123,3323 ; 3252,4156 3306,4102 3630.88,4102 C43.2@3630.88,4093
  other v2: 3296,3325 3296,3389 3295,3783 3295,3833 3287,4218 3287,4277
232_RXD: JP4.1 U3.8 | length 1897.1
  Bottom Layer w8: U3.8@4160,4816.43 4204.57,4816.43 4216,4805 4216,4677 4288,4605 4288,4291 4534,4045 4534,3801 4813,3522 5071,3522 JP4.1@5105,3556
232_TXD: JP4.2 U3.13 | length 2276
  Bottom Layer w8: U3.13@3890,4918.8 3956.2,4918.8 3977,4898 3977,4853 4061,4769 4103,4769 4271,4601 4271,4285 4516,4040 4516,3792 4800,3508 5157,3508 JP4.2@5205,3556
CAN_RX: JP8.6 U2.4 | length 1203.5
  Top Layer w8: JP8.6@3767,4658 3767,4744 3777,4754 v1(3778,4754)
  Bottom Layer w8: v1(3778,4754) 4094,4754 4255,4593 4255,4278 4317,4216 U2.4@4317,4060
CAN_TX: C7.2 JP8.5 U2.1 | length 1443.5
  Top Layer w8: JP8.5@3767,4500 3767,4582.05 3791.57,4606.61 v1@3791.57,4731 ; C7.2@3792,4810.54 3798,4804.54 3798,4731 v1(3793,4731)
  Bottom Layer w8: v1(3793,4731) 4096.28,4731 4239,4588.28 4239,4274 4263,4250 4263,4152 4232,4121 4177,4121 4167,4111 U2.1@4167,4060
CAP1: JP1.4 JP9.18 R17.2 | length 2089.3
  Top Layer w8: R17.2@2534,2719.46 2534,2879.42 JP1.4@2578,2923.42 2627,2874.42 2627,2839 2832,2634 3556,2634 3738,2452 4036,2452 4070,2486 JP9.18@4070,2631
CAP2: JP1.5 JP9.16 R18.2 | length 1914.2
  Top Layer w8: JP1.5@2578,2834.84 2578,2772.46 R18.2@2630,2720.46 2709.54,2720.46 2820,2610 3555,2610 3734,2431 4066,2431 4120,2485 JP9.16@4120,2631
CAP3: JP1.9 JP9.20 R19.2 | length 1742.7
  Top Layer w8: JP1.9@2678,2967 2728,2917 2728,2818 2849.46,2696.54 R19.2@2855,2696.54 2895.54,2656 3562,2656 3740,2478 3998,2478 4020,2500 JP9.20@4020,2631
CHIP_MODE0: JP8.23 R9.1 | length 2430.9
  Top Layer w8: JP8.23@4217,4500 4217,4430 4233,4414 4262,4414 4672,4004 4672,3791 4809,3654 5476,3654 5526,3704 5526,3910 5499.46,3936.54 R9.1@5499.46,4278
CHIP_MODE1: JP8.21 R10.1 | length 3241.9
  Top Layer w8: JP8.21@4167,4500 4167,4438 4205,4400 4247,4400 4658,3989 4658,3773 4804,3627 5473,3627 5549,3703 5549,4928.46 R10.1@5493.46,4984
DC_CAL: JP8.17 U17.12 | length 236.7
  Top Layer w8: U17.12@4038.21,4275.5 4037.9,4275.81 4037.9,4377.9 4067,4407 JP8.17@4067,4500
DC_V_FB: C52.2 JP9.25 R78.1 R80.2 | length 2771.2
  Top Layer w10: JP9.25@3870,2789 v1(3870,2855)
  Bottom Layer w10: R78.1@2734,4583.54 R80.2@2814,4583.54 C52.2@2894,4583.54 3019,4458.54 3019,3335 3064,3290 3768,3290 3870,3188 v1(3870,2855)
DIGIN1: JP9.15 R26.1 U4.16 | length 530.7
  Top Layer w8: JP9.15@4120,2789 4120,2841 4136,2857 4360,2857 4412,2909 U4.16@4412,2953.09 4412,3009 v1(4413,3009)
  Bottom Layer w8: v1(4413,3009) R26.1@4413,3066.54
DIGIN2: JP9.17 R27.1 U4.14 | length 483.6
  Top Layer w8: JP9.17@4070,2789 4070,2848 4093,2871 4272,2871 4312,2911 U4.14@4312,2953.09 v1(4312,3011)
  Bottom Layer w8: v1(4312,3011) R27.1@4312,3067.54
DIGIN3: JP9.19 R28.1 U4.12 | length 437.9
  Top Layer w8: JP9.19@4020,2789 4020,2857 4048,2885 4187,2885 4212,2910 U4.12@4212,2953.09 4212,3007 v1(4213,3008)
  Bottom Layer w8: v1(4213,3008) R28.1@4213,3065.54
DIGIN4: JP9.21 R29.1 U4.10 | length 389.6
  Top Layer w8: JP9.21@3970,2789 3970,2853 4016,2899 4104,2899 4115.94,2910.94 U4.10@4115.94,2953.09 4115.94,3010.94 v1(4116,3011)
  Bottom Layer w8: v1(4116,3011) R29.1@4116,3066.54
DIGIN5: JP9.3 R38.1 U5.16 | length 689.2
  Top Layer w8: JP9.3@4420,2789 4420,2848 4440,2868 4835,2868 4858,2891 U5.16@4858,2955.09 4858,3005 v1(4860,3007)
  Bottom Layer w8: v1(4860,3007) R38.1@4860,3064.54
DIGIN6: JP9.5 R39.1 U5.14 | length 632
  Top Layer w8: JP9.5@4370,2789 4370,2845 4411,2886 4741,2886 4758,2903 U5.14@4758,2955.09 4758,3008 v1(4759,3009)
  Bottom Layer w8: v1(4759,3009) R39.1@4759,3066.54
DIGOUT1: JP9.4 R43.2 | length 112.5
  Top Layer w8: R43.2@4420,2518.46 JP9.4@4420,2631
DIGOUT2: JP9.14 R42.2 | length 111.5
  Top Layer w8: R42.2@4170,2519.46 JP9.14@4170,2631
EN_GATE: JP8.7 R60.2 U17.16 | length 365.5
  Top Layer w8: v1(3817,4431) JP8.7@3817,4500 ; U17.16@3960,4276.03 v1(3960,4323)
  Bottom Layer w8: R60.2@3817,4481.54 v1(3817,4431) 3893,4355 3948,4355 3959,4344 v1@3959,4323
ENCODER_-A: JP1.11 R11.1 U1.2 | length 846.7
  Bottom Layer w8: JP1.11@2778,3189.16 2797.16,3170 3356,3170 3451,3075 U1.2@3502,3075 ; U1.2@3543.54,3073 3553,3063.54 R11.1@3615,3063.54
ENCODER_-B: JP1.12 R12.1 U1.15 | length 547.4
  Bottom Layer w8: JP1.12@2778,3100.58 3091.42,3100.58 3119,3073 U1.15@3314,3073
ENCODER_-Z: JP1.8 R13.1 U1.10 | length 739.1
  Bottom Layer w8: JP1.8@2678,3055.58 2678,3044 2754,2968 2983,2968 3128,2823 U1.10@3314,2823
ENCODER_A: JP1.1 R11.2 U1.1 | length 1105.4
  Bottom Layer w8: JP1.1@2578,3189.16 2578,3194.1 2668.9,3285 2813,3285 2914,3184 3378,3184 3437,3125 U1.1@3502,3125 ; 3545.54,3123 3553,3130.46 R11.2@3615,3130.46
ENCODER_B: JP1.2 R12.2 U1.14 | length 768.1
  Bottom Layer w8: JP1.2@2578,3100.58 2706.42,3100.58 2752.5,3054.5 2795.6,3054.5 2796.1,3054 3087,3054 3118,3023 U1.14@3314,3023
ENCODER_Z: JP1.7 R13.2 U1.9 | length 914.6
  Top Layer w8: JP1.7@2678,3144.16 2727,3095.16 2727,2995 2753,2969 2988,2969 3020,2937 3020,2823 v1(3071,2772)
  Bottom Layer w8: v1(3071,2772) U1.9@3313,2772
GH_A: R64.2 U17.47 | length 1201.8
  Top Layer w8: R64.2@3410.46,3237 3576,3237 v1(4075,3736) ; v1(4077,4016) 4077,4016.84 4077.58,4017.42 U17.47@4077.58,3970.5
  Bottom Layer w8: v1(4075,3736) 4077,3736 v1(4077,4016)
GH_B: R65.2 U17.42 | length 918.4
  Top Layer w8: R65.2@3415.46,3686 3423.46,3678 3923,3678 v1(3980,3735) ; v1(3979,4016) 3979,3970.66 U17.42@3979.16,3970.5
  Bottom Layer w8: v1(3979,4016) 3979,3736 v1(3980,3735)
GH_C: R66.2 U17.37 | length 1045.8
  Top Layer w8: R66.2@3409.46,4130 3455,4130 3517,4068 3517,3977 3543,3951 3543,3905.4 3709.4,3739 v1(3880,3739) ; v1(3880,4017) 3880,4020.53 3880.73,4021.27 U17.37@3880.73,3970.5
  Bottom Layer w8: v1(3880,3739) v1(3880,4017)
GL_A: R67.2 U17.45 | length 899
  Top Layer w8: R67.2@3414.46,3602 3879,3602 4038.21,3761.21 U17.45@4038.21,3970.5
GL_B: R68.2 U17.40 | length 917.4
  Top Layer w8: R68.2@3408.46,4047 3525,3930.46 3525,3903.6 3718.6,3710 3889,3710 3939.79,3760.79 U17.40@3939.79,3970.5
GL_C: R69.2 U17.35 | length 1002.1
  Top Layer w8: R69.2@3376,4424.54 3447.46,4424.54 3593,4279 3593,3895 3623,3865 3797,3865 3841.36,3909.36 U17.35@3841.36,3970.5 U17.35@3841,3970.86